# Altium PCB panel.PcbDoc
Units mil, origin at the board's own origin, x right, y up, seen from the top; angles counter-clockwise.
Board outline 3700 x 3500 mil, 2 copper layers (Top Layer, Bottom Layer); 4 components, 0 nets, 54 pads, 0 vias.
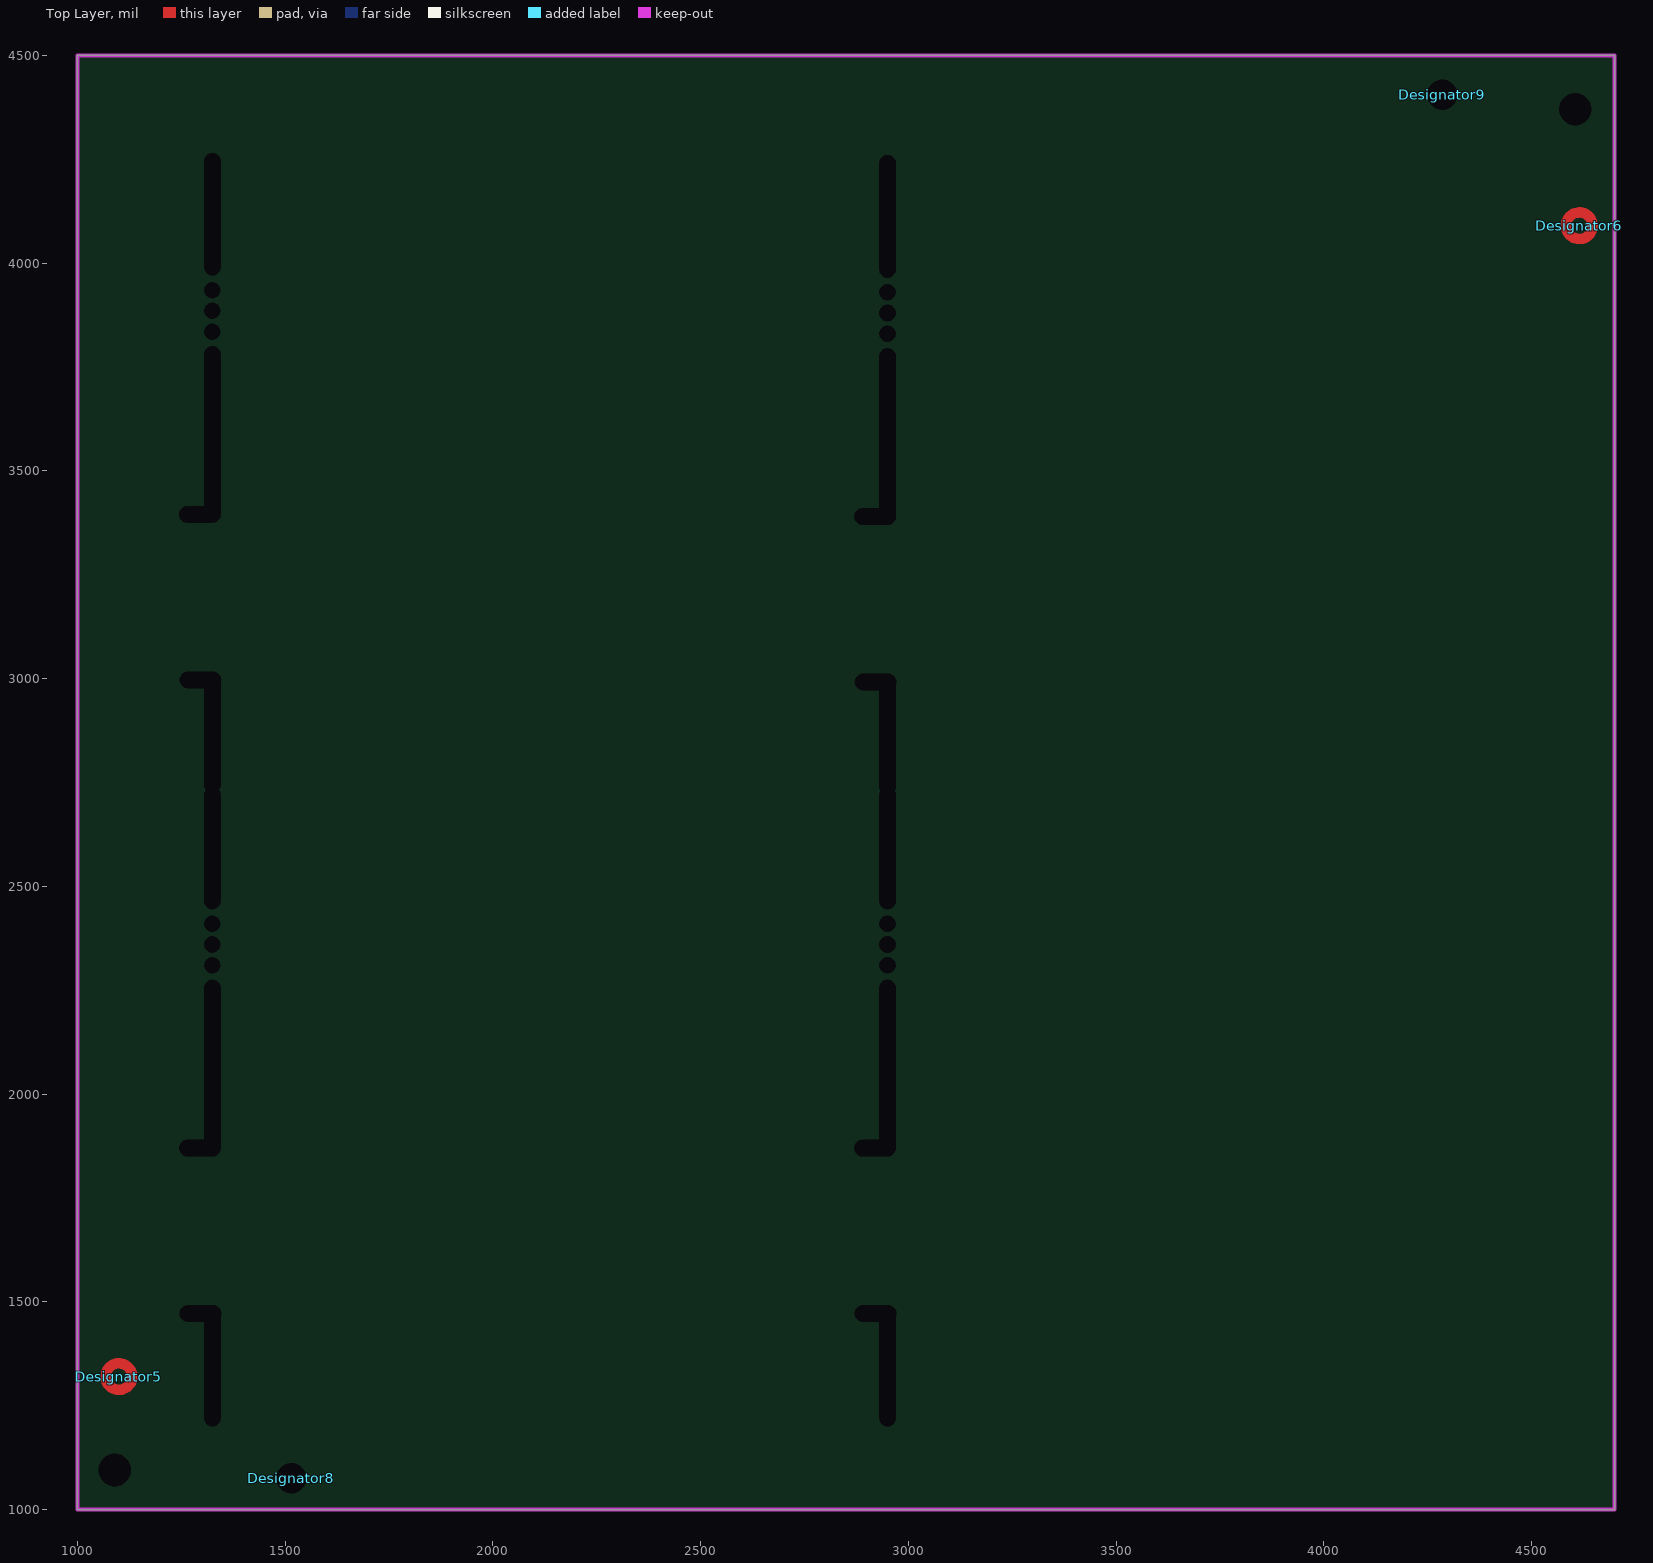
[diagram p0: Top Layer view]
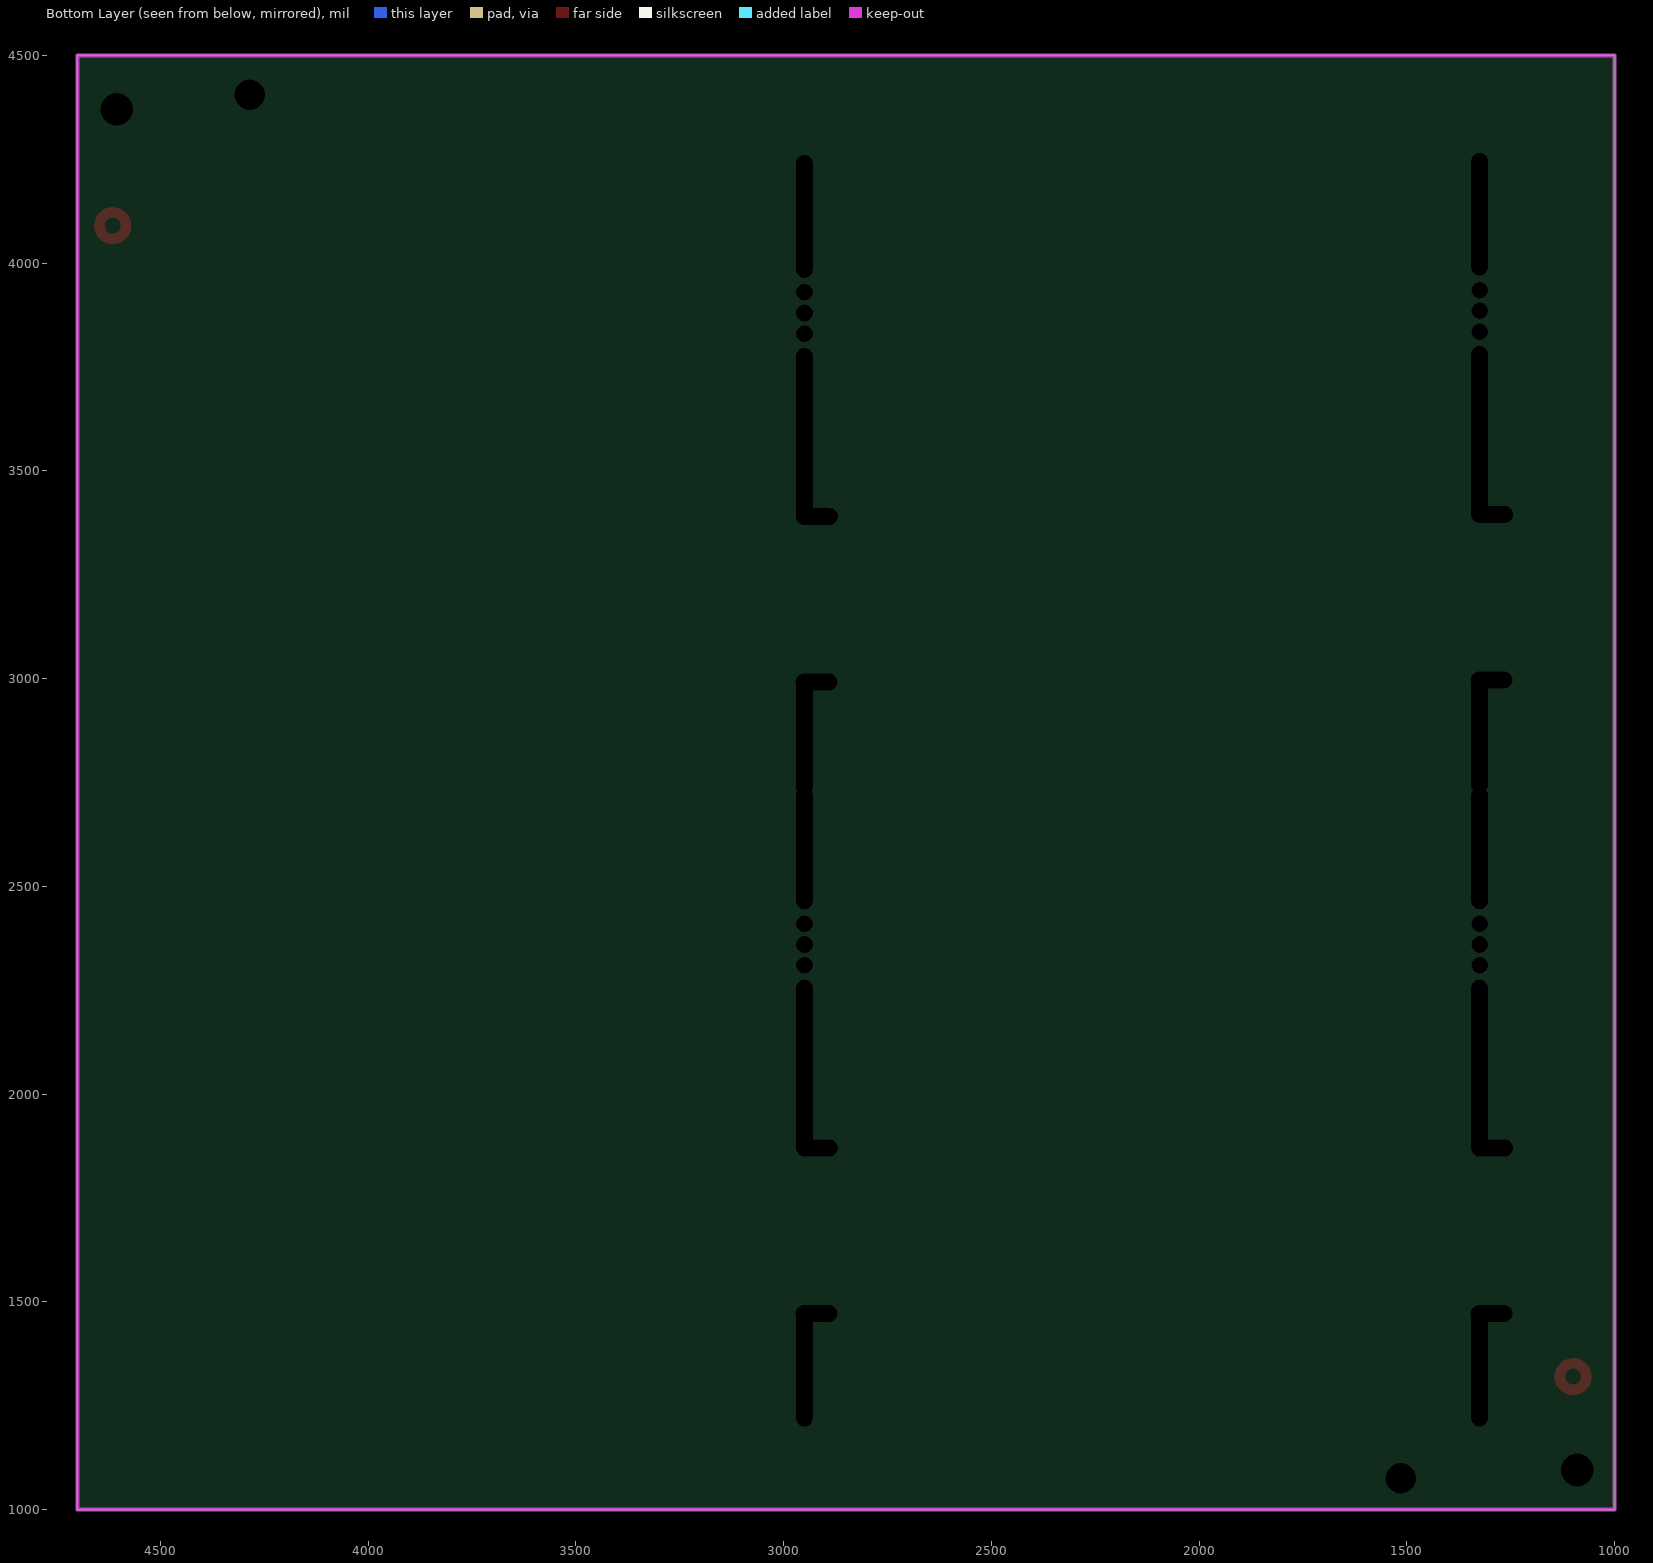
[diagram p1: Bottom Layer view, seen from below]

## Layer stack, top to bottom
Top Solder: solder mask 0.4, Solder Resist, Dk 3.5
Top Layer: signal copper 1.4
Dielectric 1: dielectric 12.6, FR-4, Dk 4.8
Bottom Layer: signal copper 1.4
Bottom Solder: solder mask 0.4, Solder Resist, Dk 3.5

## Board outline
1000,1000 4700,1000 4700,4500 1000,4500

## Design rules (kind name [scope] priority, off if disabled: settings)
Clearance [All] p1: gap=10 ignorepadtopadclearanceinfootprint=FALSE except(0: Arc-Hole Track-Hole SMDPad-Hole THPad-Hole Via-Hole Fill-Hole Poly-Hole Region-Hole Text-Hole)
PolygonConnect [All] p1: connectstyle=Relief reliefconductorwidth=10 reliefentries=4 polygonreliefangle="90 Angle" airgapwidth=10
RoutingVias [All] p1: holewidth=28 width=50 viastyle="Through Hole" minholewidth=28 minwidth=50 maxholewidth=28 maxwidth=50
SolderMaskExpansion [All] p1: expansion=4 istentingtop=FALSE
Width [All] p1: maxlimit=10 minlimit=10 preferedwidth=10
30 further rules are at their usual default settings.

## Components (designator, comment, footprint, x,y, rotation, side; value= is the part's Value field where it differs from the comment)
Designator5 "Comment" Fiducial 1100,1320 r0 top
Designator6 "Comment" Fiducial 4615,4090 r180 top
Designator8 "Comment" Panel_hole 1515,1075 r0 top
Designator9 "Comment" Panel_hole 4285,4405 r180 top

## Footprints (in the part's own frame and the unit in brackets; to place one, negate y for a bottom-side part, rotate by r counter-clockwise, add the part's x,y. Pads: shape width x height; smd on the part's side, far side on the other; paste and mask are expansions set on the pad)
Fiducial [mil]
  Top Layer circle w25.25: c0,0 r32
Panel_hole [mil]
  round 10 hole 74: 1(0,0)
  round 74 on Top Paste: 1(0,0)

## Free pads (board coordinates)
  oval 0x94.49 hole 78.74 unplated: 0(1090,1095) 0(4605,4370)
  round 0 hole 40 unplated: 6(1325,2310) 6(1325,2360) 6(1325,2410) 6(1325,3835) 6(1325,3885) 6(1325,3935) 6(2950,2310) 6(2950,2360) 6(2950,2410) 6(2950,3830) 6(2950,3880) 6(2950,3930)
  round 0 hole 40 slot 100 at 0 deg unplated: 7(1295,1870) 7(1295,3395) 7(1296.15,1471.85) 7(1296.15,2996.85) 7(2920,1870) 7(2920,3390) 7(2921.15,1471.85) 7(2921.15,2991.85)
  round 0 hole 40 slot 200 at 90 deg unplated: 7(1325,1300) 7(1325,1390) 7(1325,1955) 7(1325,2020) 7(1325,2175) 7(1325,2545) 7(1325,2640) 7(1325,2825) 7(1325,2915) 7(1325,3480) 7(1325,3545) 7(1325,3700) 7(1325,4070) 7(1325,4165) 7(2950,1300) 7(2950,1390) 7(2950,1955) 7(2950,2020) 7(2950,2175) 7(2950,2545) 7(2950,2640) 7(2950,2820) 7(2950,2910) 7(2950,3475) 7(2950,3540) 7(2950,3695) 7(2950,4065) 7(2950,4160)

## Nets (pads, with @x,y where several pads share a name; then routed paths per layer and width w, separated by ;. In a path a pad name is that pad's centre, name@x,y a point inside that pad or via, vN(x,y) a via of type N, cw(c..) or ccw(c..) an arc to the next point about the centre after c; other vN are vias at no path point)
pads on no net: Designator8.1 Designator9.1

## Keep-outs
Keep-Out Layer:
  the board outline again, w10

## Silkscreen, mask and mechanical layers (free items; w line width, h text height)
Mechanical 2:
  lines w10: 995,1195 4690,1191.13 ; 1000,2720 4700,2716.13 ; 1010,4245 4710,4241.13 ; 1660,1015 1610,1065 ; 1670,1125 1610,1065 ; 1850,1065 1610,1065 ; 2785,4660 2845,4600 ; 2840,1005 2843.63,4479.98 ; 2845,4840 2845,4600 ; 2895,4650 2845,4600 ; 3950,4415 4190,4415 ; 4130,4355 4190,4415 ; 4140,4465 4190,4415 ; 4410,4655 4470,4595 ; 4465,1000 4468.65,4489.99 ; 4470,4835 4470,4595 ; 4520,4645 4470,4595 ; 4790,1140 4740,1190 ; 4800,1250 4740,1190 ; 4825,4190 4775,4240 ; 4835,2665 4785,2715 ; 4835,4300 4775,4240 ; 4845,2775 4785,2715 ; 4980,1190 4740,1190 ; 5015,4240 4775,4240 ; 5025,2715 4785,2715
  text "V-score" at 2935,4930 h60 r90
  text "V-score" at 4560,4925 h60 r90
  text "Hole in Stencil" at 3095,4385 h60
  text "V-score" at 5105,4150 h60
  text "V-score" at 5115,2625 h60
  text "V-score" at 5070,1100 h60
  text "Hole in Stencil" at 1915,1050 h60

## Dimensions
1000,4500 to 1000,1000 on Mechanical 2
1000,4500 to 4700,4500 on Mechanical 2

## Panel: embedded boards
"SmartStepper_21_r1.0.PcbDoc" at 1265,1195, 2 rows x 2 columns, spacing 1525.44 x 1622, rotation 0